# Altium PCB short circuit protection.PcbDoc
Units mm, origin at the board's own origin, x right, y up, seen from the top; angles counter-clockwise.
Board outline 73.53 x 60.07 mm, 2 copper layers (Top Layer, Bottom Layer); 21 components, 16 nets, 61 pads, 4 vias.
Unrouted connection lines stored in the file: 1.
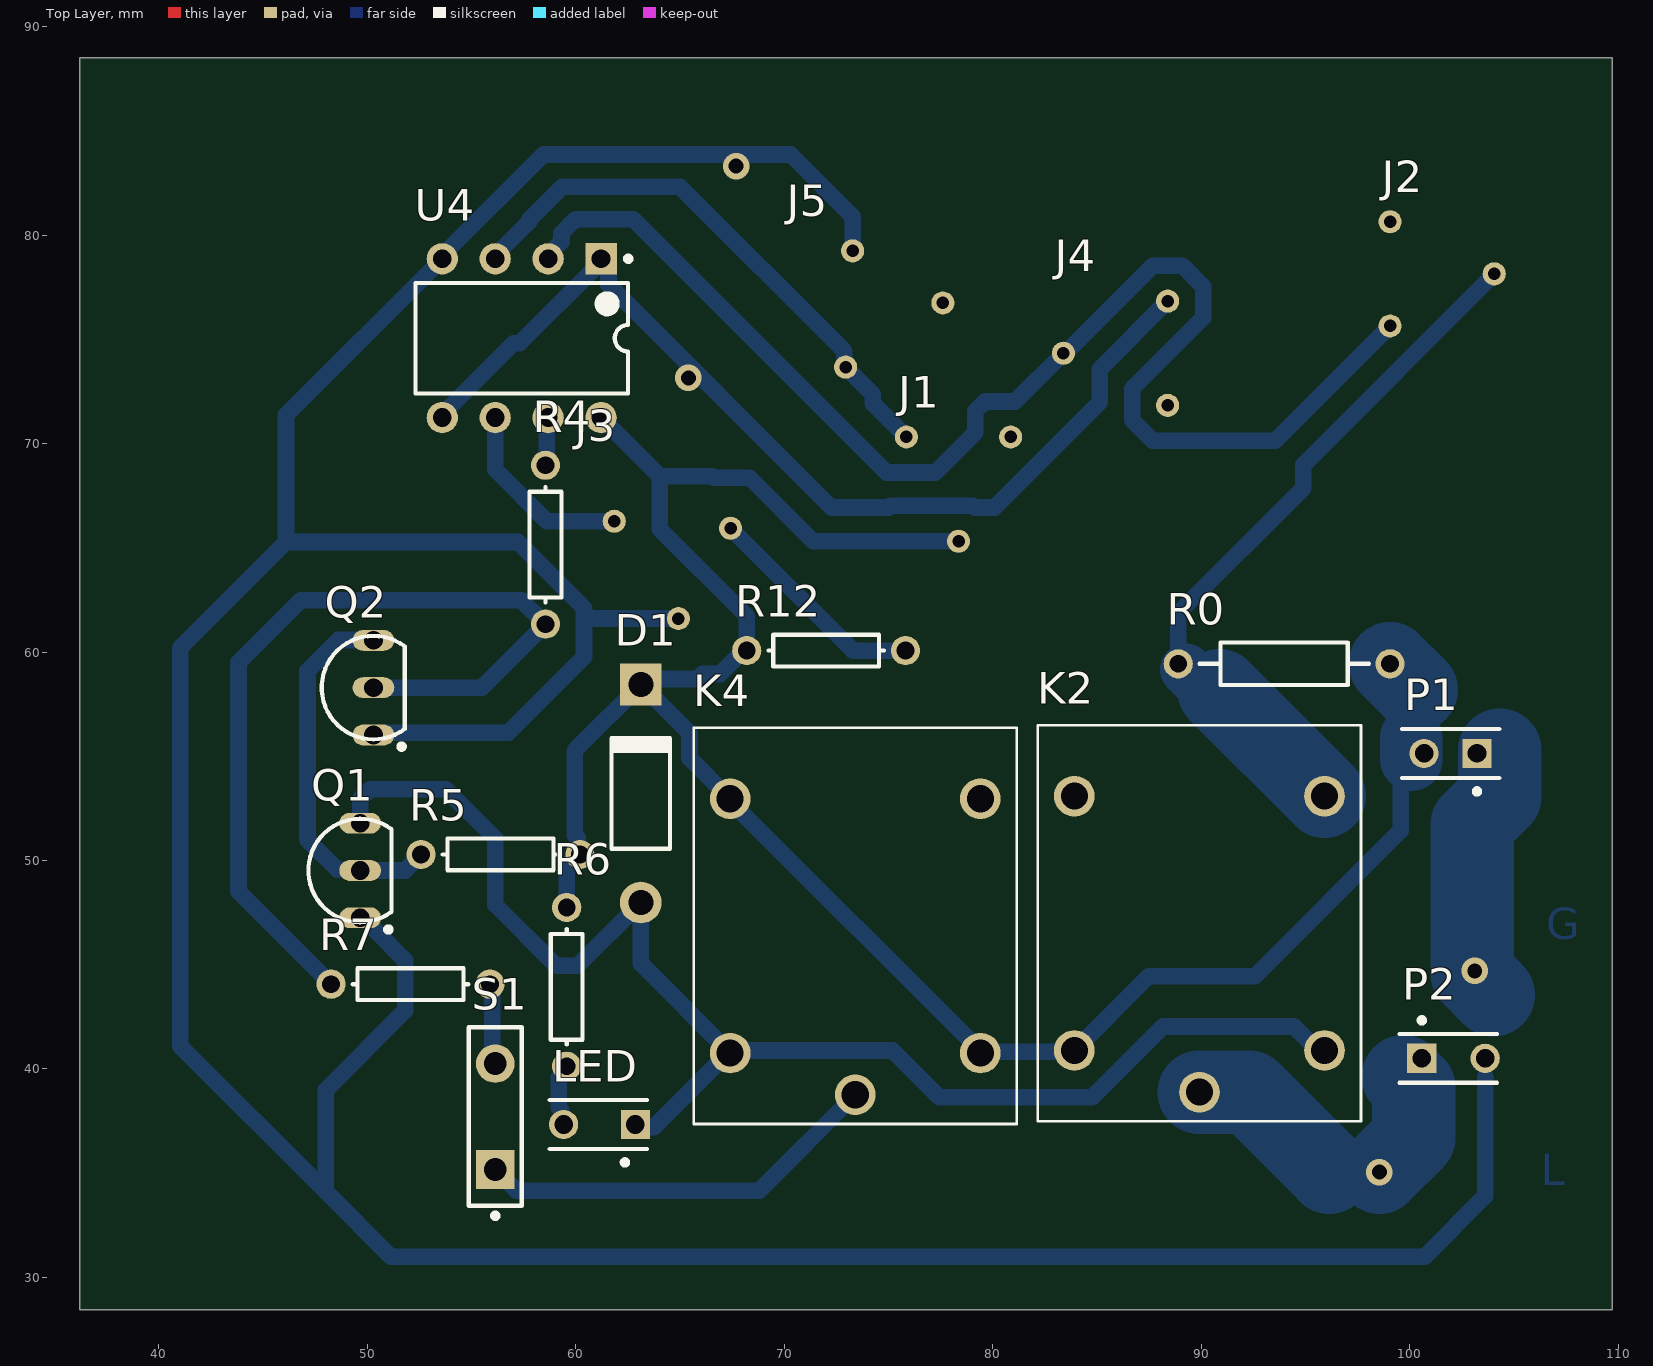
[diagram p0: Top Layer view]
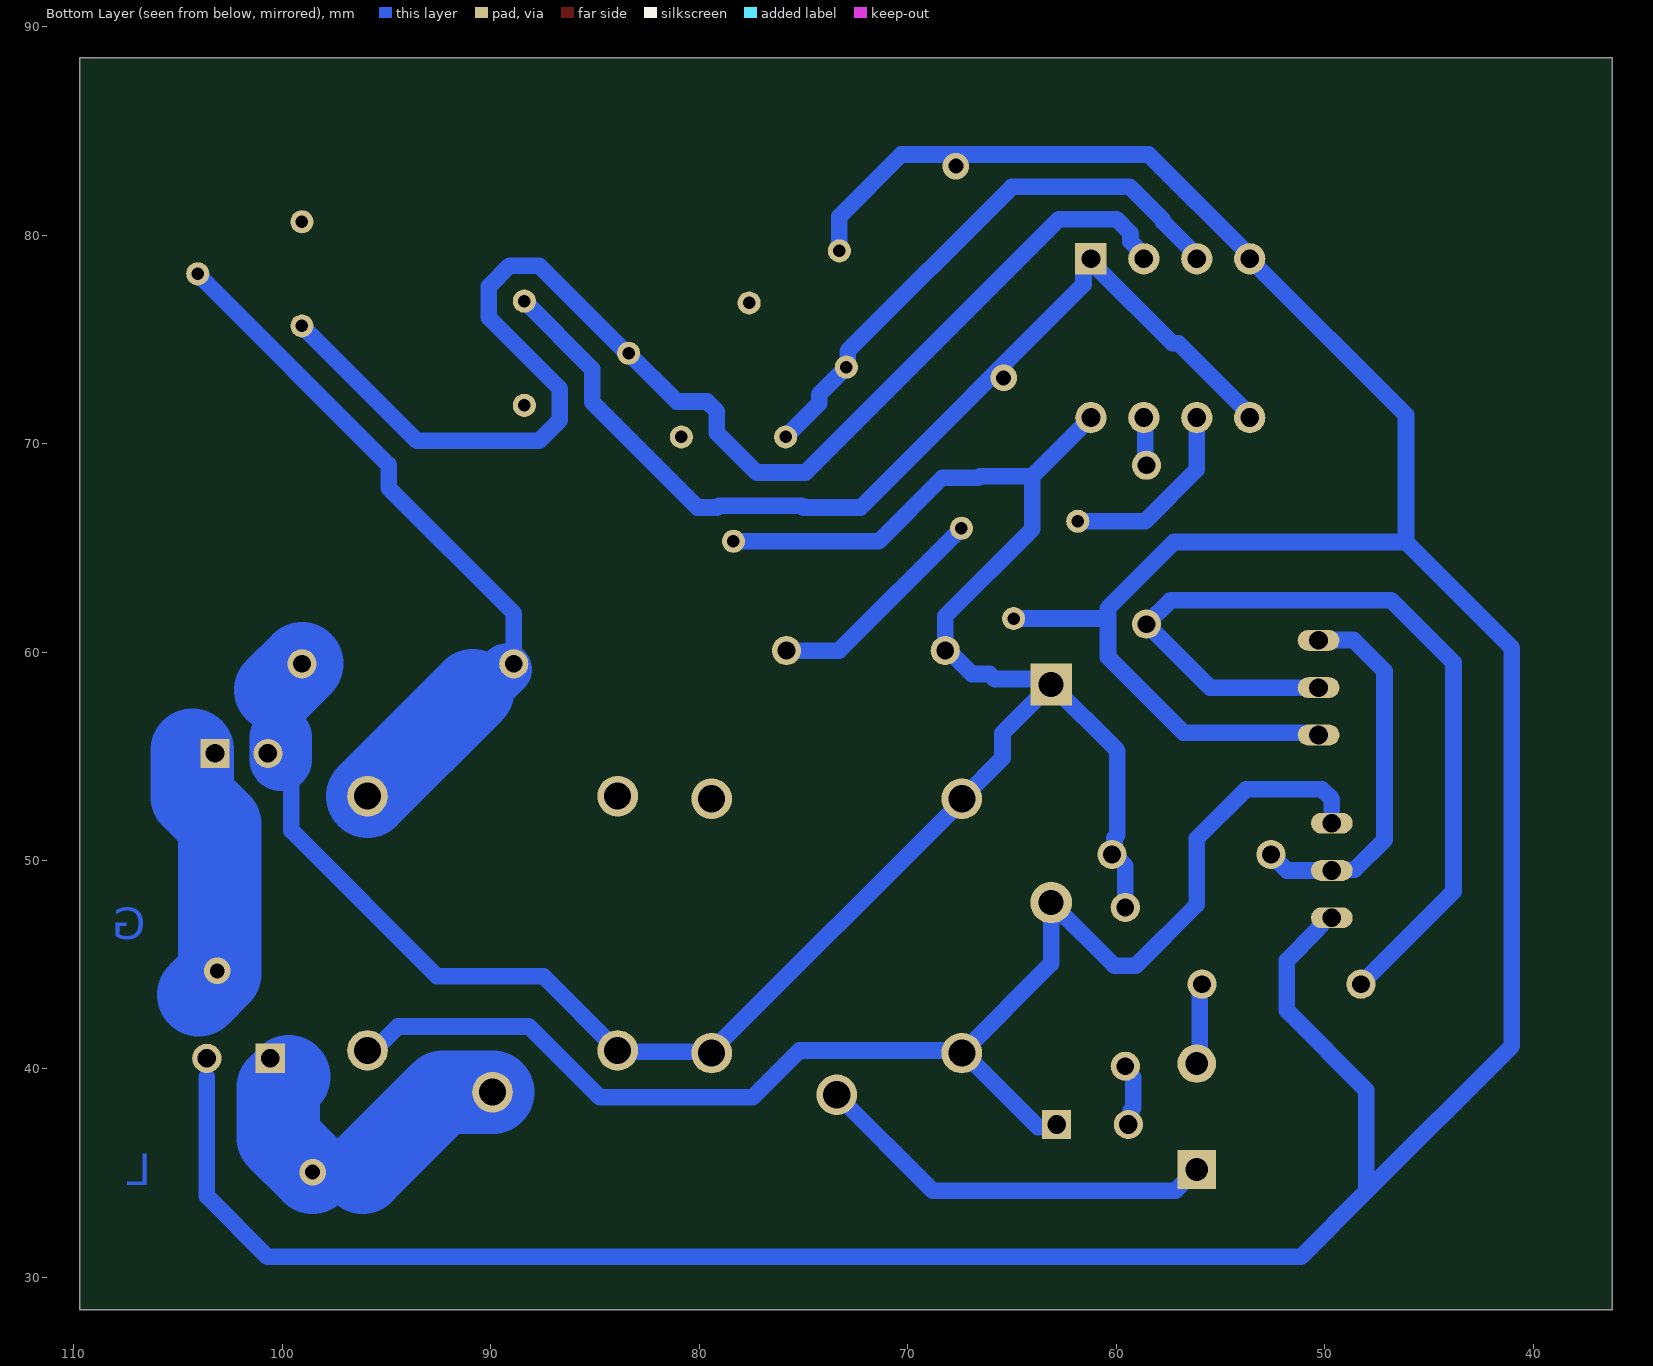
[diagram p1: Bottom Layer view, seen from below]

## Layer stack, top to bottom
Top Solder: solder mask 0.0102, Solder Resist, Dk 3.5
Top Layer: signal copper 0.0356
Dielectric 1: dielectric 0.32, FR-4, Dk 4.8
Bottom Layer: signal copper 0.0356
Bottom Solder: solder mask 0.0102, Solder Resist, Dk 3.5

## Board outline
36.195,28.448 109.728,28.448 109.728,88.519 36.195,88.519

## Design rules (kind name [scope] priority, off if disabled: settings)
Clearance [All] p1: gap=0.6 ignorepadtopadclearanceinfootprint=FALSE
HoleSize [All] p1: absolutevalues=TRUE maxlimit=2.54 minlimit=0.6 maxpercent=80.000 minpercent=20.000
PolygonConnect [All] p1: connectstyle=Relief reliefconductorwidth=0.254 reliefentries=4 polygonreliefangle="90 Angle" airgapwidth=0.254
RoomDefinition lab [InComponentClass('lab')] p1: confinementstyle=ConfineIn formatcopy=TRUE lockcomponents=FALSE outline 28.448,25.677 143.51,25.677 143.51,89.05 28.448,89.05
RoutingVias [All] p1: holewidth=0.711 width=1.27 viastyle="Through Hole" minholewidth=0.711 minwidth=1.27 maxholewidth=0.711 maxwidth=1.27
SolderMaskExpansion [All] p1: expansion=0.102 istentingtop=FALSE
Width [All] p1: maxlimit=4 minlimit=0.8 preferedwidth=0.8 minimp=50.000000 maximp=50.000000 favimp=50.000000
29 further rules are at their usual default settings.

## Components (designator, comment, footprint, x,y, rotation, side; value= is the part's Value field where it differs from the comment)
D1 "Diode 1N4007" DO-41 63.119,53.213 r90 top
J1 "RM065" RM065 78.359,67.818 r180 top
J2 "RM065" RM065 101.56,78.145 r270 top
J3 "RM065" RM065 64.008,65.024 r60 top
J4 "RM065" RM065 85.892,74.335 r90 top
J5 "RM065" RM065 74.194,75.833 r150 top
K2 "JQC-3F-1C-24VDC" RELAY_JQC-3F-1C-24VDC 89.916,46.99 r270 top
K4 "JQC-3F-1C-24VDC" RELAY_JQC-3F-1C-24VDC 73.406,46.863 r270 top
LED "5-146280-2" TECO-5-146280-2_V#1 61.087,37.338 r180 top
P1 "5-146280-2" TECO-5-146280-2_V#2 101.962,55.137 r180 top
P2 "5-146280-2" TECO-5-146280-2_V#3 101.854,40.513 r0 top
Q1 "BC546BP" TO-92A 49.657,49.522 r0 top
Q2 "BC546BP" TO-92A 50.292,58.293 r0 top
R0 "Res2" AXIAL-0.4 93.98,59.436 r0 top value="0.01 Ohm"
R4 "Res1" AXIAL-0.3 58.547,65.151 r90 top value=1K
R5 "Res1" AXIAL-0.3 56.388,50.292 r0 top value=1K
R6 "Res1" AXIAL-0.3 59.563,43.942 r90 top value=1K
R7 "Res1" AXIAL-0.3 52.07,44.069 r180 top value=1K
R12 "Res1" AXIAL-0.3 72.009,60.071 r180 top value=10K
S1 "SW-PB" SPST-2 56.134,37.719 r90 top
U4 "LM358P" P0008A 57.404,75.057 r270 top

## Footprints (in the part's own frame and the unit in brackets; to place one, negate y for a bottom-side part, rotate by r counter-clockwise, add the part's x,y. Pads: shape width x height; smd on the part's side, far side on the other; paste and mask are expansions set on the pad)
AXIAL-0.3 [mm] "Axial Device, Thru-Hole; 2 Leads; 0.3 in Pin Spacing"
  round 1.4 hole 0.85: 1(-3.81,0) 2(3.81,0)
  silkscreen extent -2.77,-0.76 2.77,0.76
AXIAL-0.4 [mm] "Axial Device, Thru-Hole; 2 Leads; 0.4 in Pin Spacing"
  round 1.4 hole 0.85: 1(-5.08,0) 2(5.08,0)
  silkscreen extent -4.06,-1.02 4.06,1.02
DO-41 [mm] "Diode, Axial; Body 5.2 x 2.7 mm (LxDia. max), Lead Dia. 0.86 mm (max)"
  round 2 hole 1.2: 1(-5.23,0)
  rect 2x2 hole 1.2: 2(5.23,0)
  silkscreen extent -2.65,-1.4 2.75,1.4
P0008A [mm] "DIP, 8-Leads, Body 10.15x6.6mm, Pitch 2.54mm"
  rect 1.5x1.5 hole 0.9: 1(-3.81,3.81)
  round 1.5 hole 0.9: 2(-3.81,1.27) 3(-3.81,-1.27) 4(-3.81,-3.81) 5(3.81,-3.81) 6(3.81,-1.27) 7(3.81,1.27) 8(3.81,3.81)
  silkscreen extent -3.93,-5.1 2.65,5.24, body extent -3.95,-5.07 3.95,5.07, height 5.08
RELAY_JQC-3F-1C-24VDC [mm]
  round 1.95 hole 1.3: COIL1(6.1,6) COIL2(6.1,-6) COM(8.1,0) NC(-6.1,-6) NO(-6.1,6)
  silkscreen extent -9.5,-7.75 9.5,7.75
RM065 [mm]
  round 1.108 hole 0.6: 1(-2.5,-2.5) 2(0,2.5) 3(2.5,-2.5)
SPST-2 [mm] "Switch; 2 Leads"
  rect 1.85x1.85 hole 1.1: 1(-2.54,0)
  round 1.85 hole 1.1: 2(2.54,0)
  silkscreen extent -4.89,-1.27 4.28,1.27
TECO-5-146280-2_V#1 [mm] "Connector, 2-Leads, Body 4.67x2.34mm, Pitch 2.54mm"
  rect 1.4x1.4 hole 0.89: 1(-1.77,0)
  round 1.4 hole 0.89: 2(1.67,0)
  silkscreen extent -2.33,-1.17 2.33,1.94, body extent -2.34,-1.17 2.34,1.17, height 5.33
TECO-5-146280-2_V#2 [mm] "Connector, 2-Leads, Body 4.67x2.34mm, Pitch 2.54mm"
  rect 1.4x1.4 hole 0.89: 1(-1.27,0)
  round 1.4 hole 0.89: 2(1.27,0)
  silkscreen extent -2.33,-1.17 2.33,1.94, body extent -2.34,-1.17 2.34,1.17, height 5.33
TECO-5-146280-2_V#3 [mm] "Connector, 2-Leads, Body 4.67x2.34mm, Pitch 2.54mm"
  rect 1.4x1.4 hole 0.89: 1(-1.27,0)
  round 1.4 hole 0.89: 2(1.77,0)
  silkscreen extent -2.33,-1.17 2.33,1.94, body extent -2.34,-1.17 2.34,1.17, height 5.33
TO-92A [mm] "TO, Flat Index; 3 In-Line, Axial Leads; Body Dia. 4.5mm; Leads 0.51 x 0.48 mm (max)"
  oval 2x1 hole 0.9: 1(0,-2.27) 2(0,0) 3(0,2.27)
  silkscreen extent -2.48,-2.95 1.5,2.48, body extent -2.48,-2.5 1.5,2.5, height 6.86

## Part data
D1: "1 Amp General Purpose Rectifier", Code_JEDEC=DO-204-AL, ComponentLink1Description="Manufacturer Link", ComponentLink1URL=http://www.fairchildsemi.com/, ComponentLink2Description=Datasheet, ComponentLink2URL=http://www.fairchildsemi.com/ds/1N%2F1N4001.pdf, DatasheetVersion=1998, LatestRevisionDate=17-Jul-2002, LatestRevisionNote="Re-released for DXP Platform.", PackageDescription="Diode, Axial; Body 5.2 x 2.7 mm (LxDia. max), Lead Dia. 0.86 mm (max)", PackageReference=DO-41, PackageVersion=Aug-1999, Published=8-Jun-2000, Publisher="Altium Limited"
J1 J2 J3 J4 J5: "Circuit Breaker Thermal 6.5A 240V AC 60V DC Rocker Panel Mount, Snap-In", Package=None, Availability="Not in stock", Check_prices=https://www.snapeda.com/parts/RM-065/Vishay/view-part/?ref=eda, MF=Vishay, MP=RM-065, Price=None, SnapEDA_Link=https://www.snapeda.com/parts/RM-065/Vishay/view-part/?ref=snap
K2 K4: "Miniature PCB Relay 24VDC, 10A 250VAC, 15A 125VAC, 10A 250VAC", Package=None, Availability=Unavailable, MP=JQC-3F-1C-24VDC, Price=None
LED P1 P2: library part CMP-2000-07492-1, "Male Header, Pitch 2.54 mm, 1 x 2 Position, Height 8.21 mm, Tail Length 3.05 mm, -65 to 105 degC, RoHS, Bulk", Case\/Package=100, Colour=Black, Current Rating=3A, Flammability Rating=UL94V-0, High Temperature Housing=Yes, Manufacturer="TE Connectivity", Max Current Rating=5A, Max Operating Temperature=105degC, Min Operating Temperature=-65degC, Package Description="Male Header, Pitch 2.54 mm, 1 x 2 Position, Height 8.21 mm, Tail Length 3.05 mm", Package Quantity=500, Approvals=CSA, Board Standoff=No(Without), Connector Type=Header, Contact Gender=Male, Contact Material=CopperAlloy, Contact Mating Length=0.23inch, Contact Plating=Matte, Contact Protection=No(Without), Contact Shape=Square, Datasheet URL=http://www.te.com/commerce/DocumentDelivery/DDEController?Action=showdoc&DocId=Customer+Drawing%7F146280%7FH1%7Fpdf%7FEnglish%7FENG_CD_146280_H1.pdf%7F5-146280-2, Datasheet Version="Rev. H1, 08/2016", Depth=2.34mm, Gasket=No(Without), High Speed Serial Data Connector=No, Housing Colour=Black, Housing Material=Polymer, Keyed=No, Length=4.67mm, Manufacturer URL=http://www.te.com/, Mating Alignment=No(Without), Mating Connector Lock=No(Without), Mating Post Length=0.23inch, Mount=ThroughHole, Mounting Technology=ThroughHole, Number of Contacts=2, Number of Positions=2, Number of Rows=1, Orientation=Straight, Package Reference=5-146280-2, Packaging=Carton, Panel Mount Retention=No(Without), PCB Mount Retention=Without, PCB Mounting Orientation=Vertical, PCB Thickness=0.063inch, Pitch=2.54mm, Radiation Hardening=No, RoHSCompliant=true, Row Spacing=2.54mm, Selectively Loaded=No(Without), Stabilizers=No(Without), Termination=ThroughHole, Termination Post Length=0.12inch
Q1 Q2: library part 2N3904, "NPN General Purpose Amplifier", ComponentLink1Description="Manufacturer Link", ComponentLink1URL=http://www.fairchildsemi.com/, ComponentLink2Description=Datasheet, ComponentLink2URL=http://www.fairchildsemi.com/ds/2N%2F2N3904.pdf, DatasheetVersion=1997, LatestRevisionDate=15-Jan-2003, LatestRevisionNote="PCB Footprint 'BCY-W3/D4.7' replaced", PackageDescription="TO, Flat Index; 3 In-Line, Axial Leads; Body Dia. 4.5mm; Leads 0.51 x 0.48 mm (max)", PackageReference=TO-92A, PackageVersion=Sep-1998, Published=8-Jun-2000, Publisher="Altium Limited"
R0 R4 R5 R6 R7 R12: "Resistor", LatestRevisionDate=17-Jul-2002, LatestRevisionNote="Re-released for DXP Platform.", Published=8-Jun-2000, Publisher="Altium Limited"
  R0: PackageDescription="Axial Device, Thru-Hole; 2 Leads; 0.4 in Pin Spacing", PackageReference=AXIAL-0.4
  R4 R5 R6 R7 R12: PackageDescription="Axial Device, Thru-Hole; 2 Leads; 0.3 in Pin Spacing", PackageReference=AXIAL-0.3
S1: "Switch", LatestRevisionDate=17-Jul-2002, LatestRevisionNote="Re-released for DXP Platform.", PackageDescription="Switch; 2 Leads", PackageReference=SPST-2, Published=24-Mar-1999, Publisher="Altium Limited"
U4: library part CMP-2000-06549-1, "Dual Operational Amplifier, 3 to 32 V, 0 to 70 degC, 8-Pin PDIP (P), RoHS, Tape and Reel", Manufacturer="Technik Industrial", Package Description="8-Pin Double In-line Package, Body 9.59 x 6.35 mm, Pitch 2.54 mm", Package Reference=P8, Datasheet URL=http://www.ti.com/lit/ds/symlink/lm358.pdf, Datasheet Version="Rev. T, 04/2015", Manufacturer URL=http://www.technik.com.hk/, Mounting Technology=ThroughHole, Package URL=http://www.ti.com/lit/ml/mpdi001b/mpdi001b.pdf

## Via types
v1: diameter 1.27, hole 0.711, Top Layer to Bottom Layer, 4 vias

## Nets (pads, with @x,y where several pads share a name; then routed paths per layer and width w, separated by ;. In a path a pad name is that pad's centre, name@x,y a point inside that pad or via, vN(x,y) a via of type N, cw(c..) or ccw(c..) an arc to the next point about the centre after c; other vN are vias at no path point)
GND: J3.1 J5.3 P1.1 P2.2 Q1.1 Q2.1 U4.4 | length 204.1
  Bottom Layer w0.8: Q1.1@49.7,47.244 50.111,47.244 50.195,47.16 50.195,46.85 50.362,46.683 50.362,46.666 51.816,45.212 51.816,42.799 48.006,38.989 48.006,34.116 ; Q2.1@50.542,56.115 50.596,56.061 50.884,56.061 50.957,56.134 56.769,56.134 60.397,59.762 60.397,61.468 ; J3.1 60.538,61.609 60.397,61.468 ; J5.3 73.279,80.899 70.311,83.867 58.447,83.867 53.594,79.014 U4.4 46.101,71.374 46.101,65.278 ; P1.1 P1.1@103.34,55.029 ; 103.624,39.624 103.624,33.901 100.711,30.988 51.134,30.988 48.006,34.116 ; 46.101,65.278 57.226,65.278 60.397,62.107 60.397,61.468 ; 46.101,65.278 41.021,60.198 41.021,41.101 48.006,34.116
  Bottom Layer w4: 104.013,43.561 102.997,44.577 102.997,51.737 104.326,53.066 104.326,55.304
  other v1: 103.124,44.704 67.691,83.312
NetC3_2: J4.3 U4.1 U4.5 | length 48.7
  Bottom Layer w0.8: U4.5 53.594,71.394 57.015,74.815 57.309,74.815 60.864,78.37 60.864,78.517 U4.1 61.564,78.517 61.564,77.628 72.255,66.937 75.003,66.937 75.088,67.022 79.065,67.022 79.15,66.937 80.086,66.937 85.138,71.989 85.138,73.581 J4.3
  other v1: 65.405,73.152
NetD1_1: D1.1 K2.COIL1 K4.COIL2 LED.1 Q1.3 | length 67.6
  Bottom Layer w0.8: Q1.3 49.657,52.943 50.126,53.412 53.776,53.412 56.134,51.054 56.134,47.879 59.055,44.958 60.094,44.958 D1.1 63.119,45.05 K4.COIL2 ; LED.1@63.119,37.211 63.754,37.211 67.306,40.763 K4.COIL2 ; K2.COIL1 95.605,40.89 94.455,42.04 88.174,42.04 84.772,38.638 77.44,38.638 75.19,40.888 67.531,40.888 K4.COIL2
NetJ1_3: J1.3 J5.2 U4.3 | length 26.9
  Bottom Layer w0.8: U4.3 56.134,79.014 57.764,80.644 57.764,80.735 59.346,82.317 65.003,82.317 72.885,74.435 72.885,73.727 74.25,72.362 74.25,71.927 J1.3
NetJ2_2: J2.2 K2.NO R0.1 | length 34.6
  Bottom Layer w0.8: R0.1@89.27,59.171 89.004,59.436 R0.1 88.9,61.868 94.899,67.867 94.899,68.984 J2.2 ; 90.296,58.145 90.861,58.145
  Bottom Layer w2.5: R0.1@89.27,59.171 90.296,58.145
  Bottom Layer w4: 90.861,58.145 K2.NO
NetJ2_3: J2.3 J4.2 U4.2 | length 65.4
  Bottom Layer w0.8: U4.2 58.674,79.056 59.314,79.696 59.314,80.093 59.988,80.767 62.743,80.767 74.896,68.614 77.25,68.614 79.155,70.519 79.155,71.553 79.624,72.022 81.079,72.022 J4.2 ; J4.2@83.588,74.441 87.686,78.539 89.098,78.539 90.096,77.541 90.096,76.039 86.688,72.631 86.688,71.129 87.686,70.131 93.546,70.131 J2.3
NetJ3_2: J3.2 U4.6 | length 9.2
  Bottom Layer w0.8: U4.6 56.134,68.758 58.618,66.274 J3.2
NetJ3_3: J3.3 R12.1 | length 10.8
  Bottom Layer w0.8: J3.3 73.291,60.071 R12.1
NetK2_COM: K2.COM P2.1 | length 13.3
  Bottom Layer w4: K2.COM 92.315,38.89 96.153,35.052 ; v1(98.552,35.052) 100.203,36.703 100.203,39.116 99.695,39.624
NetK4_COM: K4.COM S1.1 | length 19.6
  Bottom Layer w0.8: S1.1 57.15,34.163 68.806,34.163 K4.COM
NetLED_2: LED.2 R6.1 | length 3.2
  Bottom Layer w0.8: R6.1 59.563,39.97 59.182,39.589 59.182,38.135 59.302,38.015 59.302,37.615 59.579,37.338 LED.2@59.694,37.338
NetQ1_2: Q1.2 Q2.3 R5.1 | length 18.4
  Bottom Layer w0.8: Q2.3@50.383,60.579 48.608,60.579 47.126,59.097 47.126,50.99 48.555,49.56 49.619,49.56 Q1.2 51.808,49.522 R5.1
NetQ2_2: Q2.2 R4.1 R7.2 | length 43.2
  Bottom Layer w0.8: R7.2 43.815,48.514 43.815,59.5 46.799,62.484 57.404,62.484 R4.1 ; Q2.2 55.499,58.293 58.385,61.179 R4.1@58.385,61.341
NetR4_2: R4.2 U4.7 | length 2.3
  Bottom Layer w0.8: R4.2 58.61,69.025 58.61,71.183 U4.7
NetR7_1: R7.1 S1.2 | length 3.9
  Bottom Layer w0.8: R7.1 55.995,43.954 55.995,40.398 S1.2
VCC: D1.2 J1.2 K2.COIL2 K4.COIL1 K4.NC P1.2 R0.2 R5.2 R6.2 R12.2 U4.8 | length 103.9
  Bottom Layer w0.8: R6.2 59.563,49.749 60.106,50.292 R5.2 60.083,50.407 60.083,51.085 59.944,51.224 59.944,55.268 D1.2 ; U4.8 64.033,68.428 ; J1.2 71.388,65.318 68.344,68.362 66.616,68.362 66.55,68.428 64.033,68.428 ; P1.2 100.692,54.975 99.568,53.851 99.568,51.435 92.583,44.45 87.476,44.45 K2.COIL2 83.851,40.825 79.695,40.825 79.629,40.759 79.41,40.759 K4.COIL1 79.406,40.863 67.406,52.863 K4.NC 65.452,54.917 65.452,56.11 D1.2 ; D1.2 63.386,58.71 65.831,58.71 66.069,58.948 66.914,58.948 68.037,60.071 R12.2 68.199,61.722 64.033,65.888 64.033,68.428
  Bottom Layer w3: P1.2@100.076,54.827 100.076,55.914
  Bottom Layer w4: R0.2 100.316,58.18
pads on no net: J1.1 J2.1 J4.1 J5.1 K2.NC K4.NO

## Other copper
Bottom Layer:
  text "G" at 106.553,46.228 h1.52
  text "L" at 106.299,34.417 h1.52